# Altium PCB connector_boards.PcbDoc
Units mm, origin at the board's own origin, x right, y up, seen from the top; angles counter-clockwise.
Board outline 178.4 x 17 mm, 2 copper layers (Top Layer, Bottom Layer); 17 components, 5 nets, 84 pads, 9 vias.
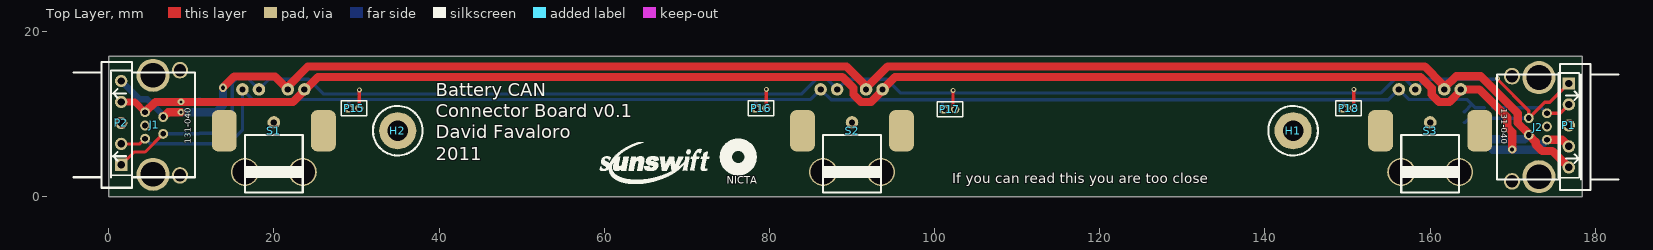
[diagram p0: Top Layer view]
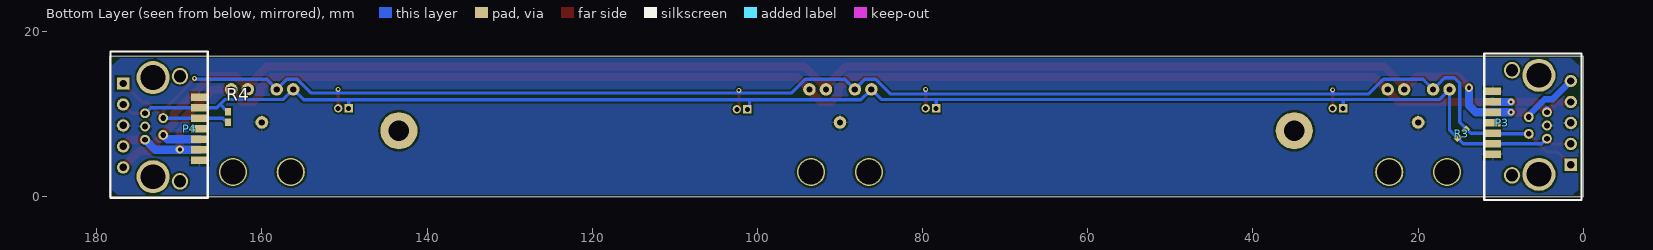
[diagram p1: Bottom Layer view, seen from below]

## Layer stack, top to bottom
Top Layer: signal copper 0.0356
Dielectric: dielectric 0.32, FR-4, Dk 4.8
Bottom Layer: signal copper 0.0356

## Board outline
0,0 178.4,0 178.4,17 0,17

## Design rules (kind name [scope] priority, off if disabled: settings)
Clearance [All] p1: gap=0.254
ComponentClearance [All] p1 off: gap=0.2 collisioncheckmode=3 verticalgap=0.254 showdistances=FALSE
HoleSize [All] p1: absolutevalues=TRUE maxlimit=10 minlimit=0.025 maxpercent=80.000 minpercent=20.000
MinimumSolderMaskSliver [All] p1 off: minsoldermaskwidth=0.254
PolygonConnect [All] p1: connectstyle=Relief reliefconductorwidth=0.254 reliefentries=4 polygonreliefangle="90 Angle"
RoutingVias [All] p1: holewidth=0.3 width=0.6 viastyle="Through Hole" minholewidth=0.2 minwidth=0.4 maxholewidth=1 maxwidth=2
SilkToSilkClearance [All] p1 off: silktosilkclearance=0.254
SilkscreenOverComponentPads [All] p1 off: minsilkscreentomaskgap=0.254
SolderMaskExpansion [All] p1: expansion=0.102
TestPointUsage [All] p1: valid=0 allowmultiple=FALSE
Testpoint [All] p1: side=15 testpointundercomponent=TRUE minsize=1.016 maxsize=2.54 preferedsize=1.524 minholesize=0 maxholesize=1.016 preferedholesize=0.813 testpointgrid=0.025 style=1023 order=0123456789
Width [All] p1: maxlimit=2 minlimit=0.254 preferedwidth=0.254
19 further rules are at their usual default settings.

## Components (designator, comment, footprint, x,y, rotation, side; value= is the part's Value field where it differs from the comment)
H1 "HOLE" M2.5 143.4,8 r0 top
H2 "HOLE" M2.5 35,8 r0 top
J1 "CON5" TRIAD5F 6.604,9.652 r90 top
J2 "CON5" TRIAD5F 171.942,7.493 r270 top
P1 "Header 5" HDR1X5 176.784,13.716 r270 top
P2 "Header 5" HDR1X5 1.524,3.858 r90 top
P3 "SATA" 47080-4005-SATA 8.636,2.588 r90 bottom
P4 "SATA" 47080-4005-SATA 169.91,14.605 r270 bottom
P15 "MHDR1X2" MHDR1X2 29.083,10.716 r0 top
P16 "MHDR1X2" MHDR1X2 78.359,10.716 r0 top
P17 "MHDR1X2" MHDR1X2 101.219,10.589 r0 top
P18 "MHDR1X2" MHDR1X2 149.479,10.716 r0 top
R3 "Res Semi" 1005[0402] 14.732,7.62 r315 bottom
R4 "Res Semi" 1005[0402] 164.084,9.652 r90 bottom
S1 "bms_can_solder" pcb_bcan_soldertabs 20,3 r0 top
S2 "bms_can_solder" pcb_bcan_soldertabs 90,3 r0 top
S3 "bms_can_solder" pcb_bcan_soldertabs 160,3 r0 top

## Footprints (in the part's own frame and the unit in brackets; to place one, negate y for a bottom-side part, rotate by r counter-clockwise, add the part's x,y. Pads: shape width x height; smd on the part's side, far side on the other; paste and mask are expansions set on the pad)
1005[0402] [mm] "Chip Resistor; Body 1.1 x 0.5 mm (LxW typ)"
  rect 0.9x0.7 smd: 1(-0.65,0) 2(0.65,0)
47080-4005-SATA [mm]
  round 2 hole 1.5: 0(0,0) 0(12.74,0)
  rect 0.9x2 smd: 1(2.56,2.36) 2(3.83,2.36) 3(5.1,2.36) 4(6.37,2.36) 5(7.64,2.36) 6(8.91,2.36) 7(10.18,2.36)
  silkscreen extent -3,-8.4 14.74,3.36
HDR1X5 [mm] "Connector; Header; 5 Position"
  rect 1.5x1.5 hole 0.9: 1(0,0)
  round 1.5 hole 0.9: 2(2.54,0) 3(5.08,0) 4(7.62,0) 5(10.16,0)
  silkscreen extent -1.27,-1.27 11.43,1.27
M2.5 [mm]
  round 4.5 hole 2.5: 1(0,0)
  silkscreen extent -3,-3 3,3
MHDR1X2 [mm] "Connector; Header; 2 Position"
  rect 1x1 hole 0.6: 1(0,0)
  round 1 hole 0.6: 2(1.27,0)
  silkscreen extent -0.9,-0.9 2.17,0.9
pcb_bcan_soldertabs [mm]
  rrect50% 3x5 smd: 0(-6,5) 0(6,5)
  round 3.4 hole 3: 0(-3.5,0) 0(3.5,0)
  round 1.524 hole 0.762: 1(-3.8,10) 2(-1.8,10) 3(0,6) 4(1.7,10) 5(3.7,10)
  silkscreen extent -3.5,-2.5 3.5,4.5
TRIAD5F [mm]
  round 4 hole 3: 0(-6.934,1.219) 0(5.055,1.219)
  round 1.2 hole 0.7: 1(0,0) 2(0.584,2.184) 3(-1.016,2.184) 4(-2.616,2.184) 5(-2.032,0)
  silkscreen extent -8.56,-3.86 6.68,10.87

## Part data
H1 H2: "Hole"
J1 J2: "Connector"
P1 P2: "Header, 5-Pin"
P15 P16 P17 P18: "Header, 2-Pin"
R3 R4: "Semiconductor Resistor"

## Free pads (board coordinates)
  round 1.495 on Top Overlay mask+0.2: 2(79.091,4.598)

## Via types
v1: diameter 0.6, hole 0.3, Top Layer to Bottom Layer, 5 vias
v2: diameter 0.8, hole 0.4, Top Layer to Bottom Layer, 2 vias
v3: diameter 1, hole 0.5, Top Layer to Bottom Layer, 2 vias

## Nets (pads, with @x,y where several pads share a name; then routed paths per layer and width w, separated by ;. In a path a pad name is that pad's centre, name@x,y a point inside that pad or via, vN(x,y) a via of type N, cw(c..) or ccw(c..) an arc to the next point about the centre after c; other vN are vias at no path point)
CANH: J1.4 J2.4 P1.2 P2.2 P3.2 P4.2 P15.1 P16.1 P17.1 P18.1 R3.2 R4.2 S1.1 S2.1 S3.1 | length 189.6
  Top Layer w0.4: P2.2 3.782,6.398 J1.4 J1.4@4.42,6.754 ; J2.4 175.717,10.109 P1.2
  Bottom Layer w0.4: J1.4 5.037,6.418 P3.2 14.558,6.418 16.2,8.06 S1.1 17.416,11.784 30.734,11.784 78.359,11.784 ; P15.1 29.083,11.784 ; P16.1 78.359,11.784 ; S2.1 84.984,11.784 78.359,11.784 ; S2.1@86.344,12.856 87.468,11.732 149.479,11.732 ; P17.1@100.965,10.589 100.965,11.713 ; P18.1 149.479,11.732 ; S3.1 154.932,11.732 149.479,11.732 ; S3.1@156.344,12.856 157.416,11.784 164.453,11.784 165.057,11.18 ; R4.2 164.178,10.302 165.057,11.18 ; P4.2@166.55,10.775 165.462,10.775 165.057,11.18 ; P4.2 173.461,10.775 J2.4
CANL: J1.5 J2.5 P1.1 P2.1 P3.3 P4.3 P15.2 P16.2 P17.2 P18.2 R3.1 R4.1 S1.2 S2.2 S3.2 | length 211.4
  Top Layer w0.4: P2.1 3.088,5.422 4.406,5.422 J1.5 ; P15.2 v1(30.353,12.954) ; P16.2@79.629,10.589 v1(79.629,13.002) ; P17.2@102.235,10.589 v1(102.235,12.875) ; P18.2 v1(150.749,13.002) ; v1(168.148,14.338) 168.148,14.224 171.942,10.43 J2.5 173.847,11.43 174.498,11.43 P1.1
  Bottom Layer w0.4: J1.5 10.928,7.62 P3.3 13.657,7.688 14.984,9.015 14.984,12.748 ; 14.976,12.756 14.984,12.748 ; 30.353,12.621 v1(30.353,12.954) ; 79.629,12.494 v1(79.629,13.002) ; 102.235,12.573 v1(102.235,12.875) ; 150.749,12.573 v1(150.749,13.002) ; R4.1 164.226,9.002 164.729,9.505 166.55,9.505 P4.3@167.372,9.505 ; P4.3 171.922,9.505 J2.5 ; v1(168.148,14.338) 168.026,14.216 159.416,14.216 S3.2 156.984,14.216 155.696,14.216 154.053,12.573 95.847,12.573 94.204,14.216 89.416,14.216 S2.2 86.984,14.216 85.696,14.216 83.926,12.446 25.974,12.446 24.204,14.216 19.416,14.216 S1.2 16.801,14.399 15.621,14.399 14.984,13.762 14.984,12.748
GND: J1.3 J2.3 P1.3 P2.3 P3.1 P3.4 P3.7 P4.1 P4.4 P4.7 S1.3 S2.3 S3.3
INTERRUPT: J1.2 J2.2 P1.4 P2.4 P3.6 P4.6 S1.5 S2.5 S3.5 | length 193.8
  Top Layer w0.8: P2.4 3.178,11.478 J1.2
  Top Layer w1: J1.2 5.667,11.484 v2(8.763,11.484) 22.328,11.484 23.7,12.856 25.36,14.516 88.828,14.516 90.184,13.16 90.184,12.372 91.072,11.484 92.328,11.484 93.7,12.856 S2.5 95.216,14.516 158.828,14.516 160.184,13.16 160.184,12.372 161.072,11.484 162.328,11.484 163.7,12.856 S3.5 165.943,13 169.334,9.609 169.334,8.445 169.926,7.853 v3(169.926,5.715) ; J2.2 175.971,6.909 P1.4
  Bottom Layer w0.8: J1.2@4.42,10.538 J1.2@4.42,10.564
  Bottom Layer w1: v2(8.763,11.484) 10.982,11.484 P3.6 ; S2.5@93.556,13 S2.5 ; S3.5@163.556,13 S3.5 ; P4.6 172.913,5.695 J2.2
ISO_VCC: J1.1 J2.1 P1.5 P2.5 P3.5 P4.5 S1.4 S2.4 S3.4 | length 197.4
  Top Layer w1: J1.1 7.182,10.23 v2(8.763,10.23) ; v3(13.843,13.208) 15.199,14.564 20.136,14.564 S1.4 21.7,13.362 24.108,15.77 89.347,15.77 91.438,13.679 91.438,13.262 S2.4 91.7,13.144 94.326,15.77 159.347,15.77 161.438,13.679 161.438,13.262 S3.4 161.7,13.144 163.161,14.605 166.111,14.605 170.588,10.128 170.588,8.964 171.942,7.61 J2.1 172.772,6.663 172.772,6.348 173.566,5.555 174.785,5.555 P1.5
  Bottom Layer w0.8: P2.5 3.739,11.803 4.671,11.803 6.604,9.87 J1.1
  Bottom Layer w1: v2(8.763,10.23) 8.765,10.228 P3.5 13.022,10.228 13.843,11.049 v3(13.843,13.208) ; P4.5 167.554,6.969 170.445,6.969 170.449,6.965 171.414,6.965 J2.1
pads on no net: H1.1 H2.1 J1.0 J2.0 P3.0 P4.0 S1.0 S2.0 S3.0

## Polygon pours and split planes (outlines as drawn)
GND on Bottom Layer "GND" (solid, pour order 1000): 0.508,15.88 1.546,16.764 5.815,16.764 177.143,16.764 178.181,15.88 178.181,0.942 178.181,0.844 177.489,0.254 1.431,0.254 1.316,0.254 0.623,0.844

## Silkscreen, mask and mechanical layers (free items; w line width, h text height)
Top Overlay:
  drawing of 1660 lines, arcs and shapes, not listed
  text "Battery CAN" at 39.624,12.192 h1.6
  text "Connector Board v0.1" at 39.624,9.652 h1.6
  text "David Favaloro" at 39.624,7.112 h1.6
  text "2011" at 39.624,4.445 h1.6
  text "If you can read this you are too close" at 102.108,1.651 h1.2
  text "NICTA" at 74.813,1.282 h1.51
Mechanical 1:
  the board outline again, w0.254
  text "Ready for Manufacture 11/09/11" at 67.507,30.844 h1.52

## Text inside footprints (layer, text, board x,y; h text height)
J1: Top Overlay "131-040" at 9.957,6.426 h0.76 r90
J2: Top Overlay "131-040" at 168.589,10.719 h0.76 r270